# EAGLE board bt-shield (EAGLE 6.1)
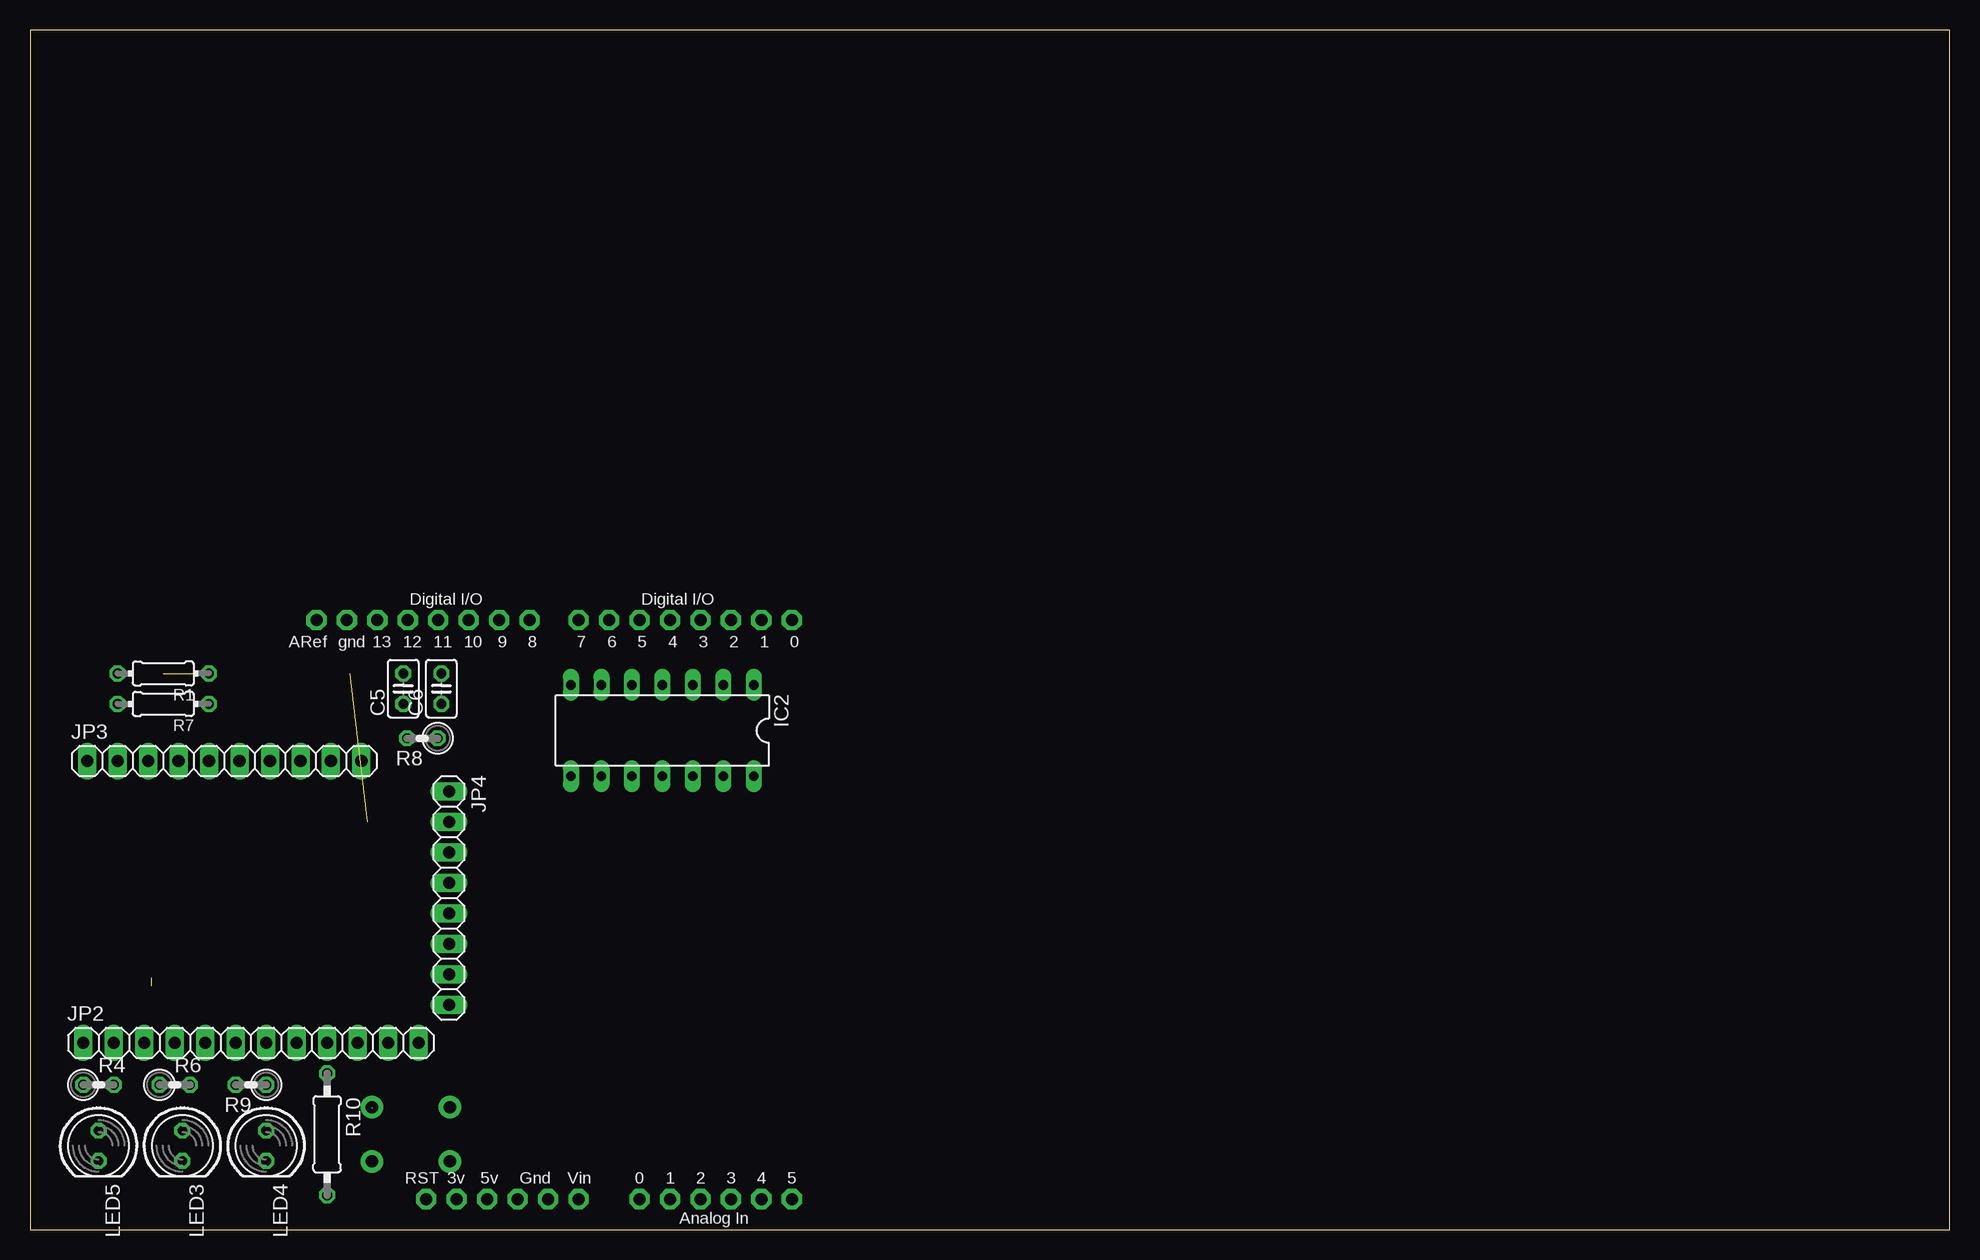
[diagram p0: board, top side]
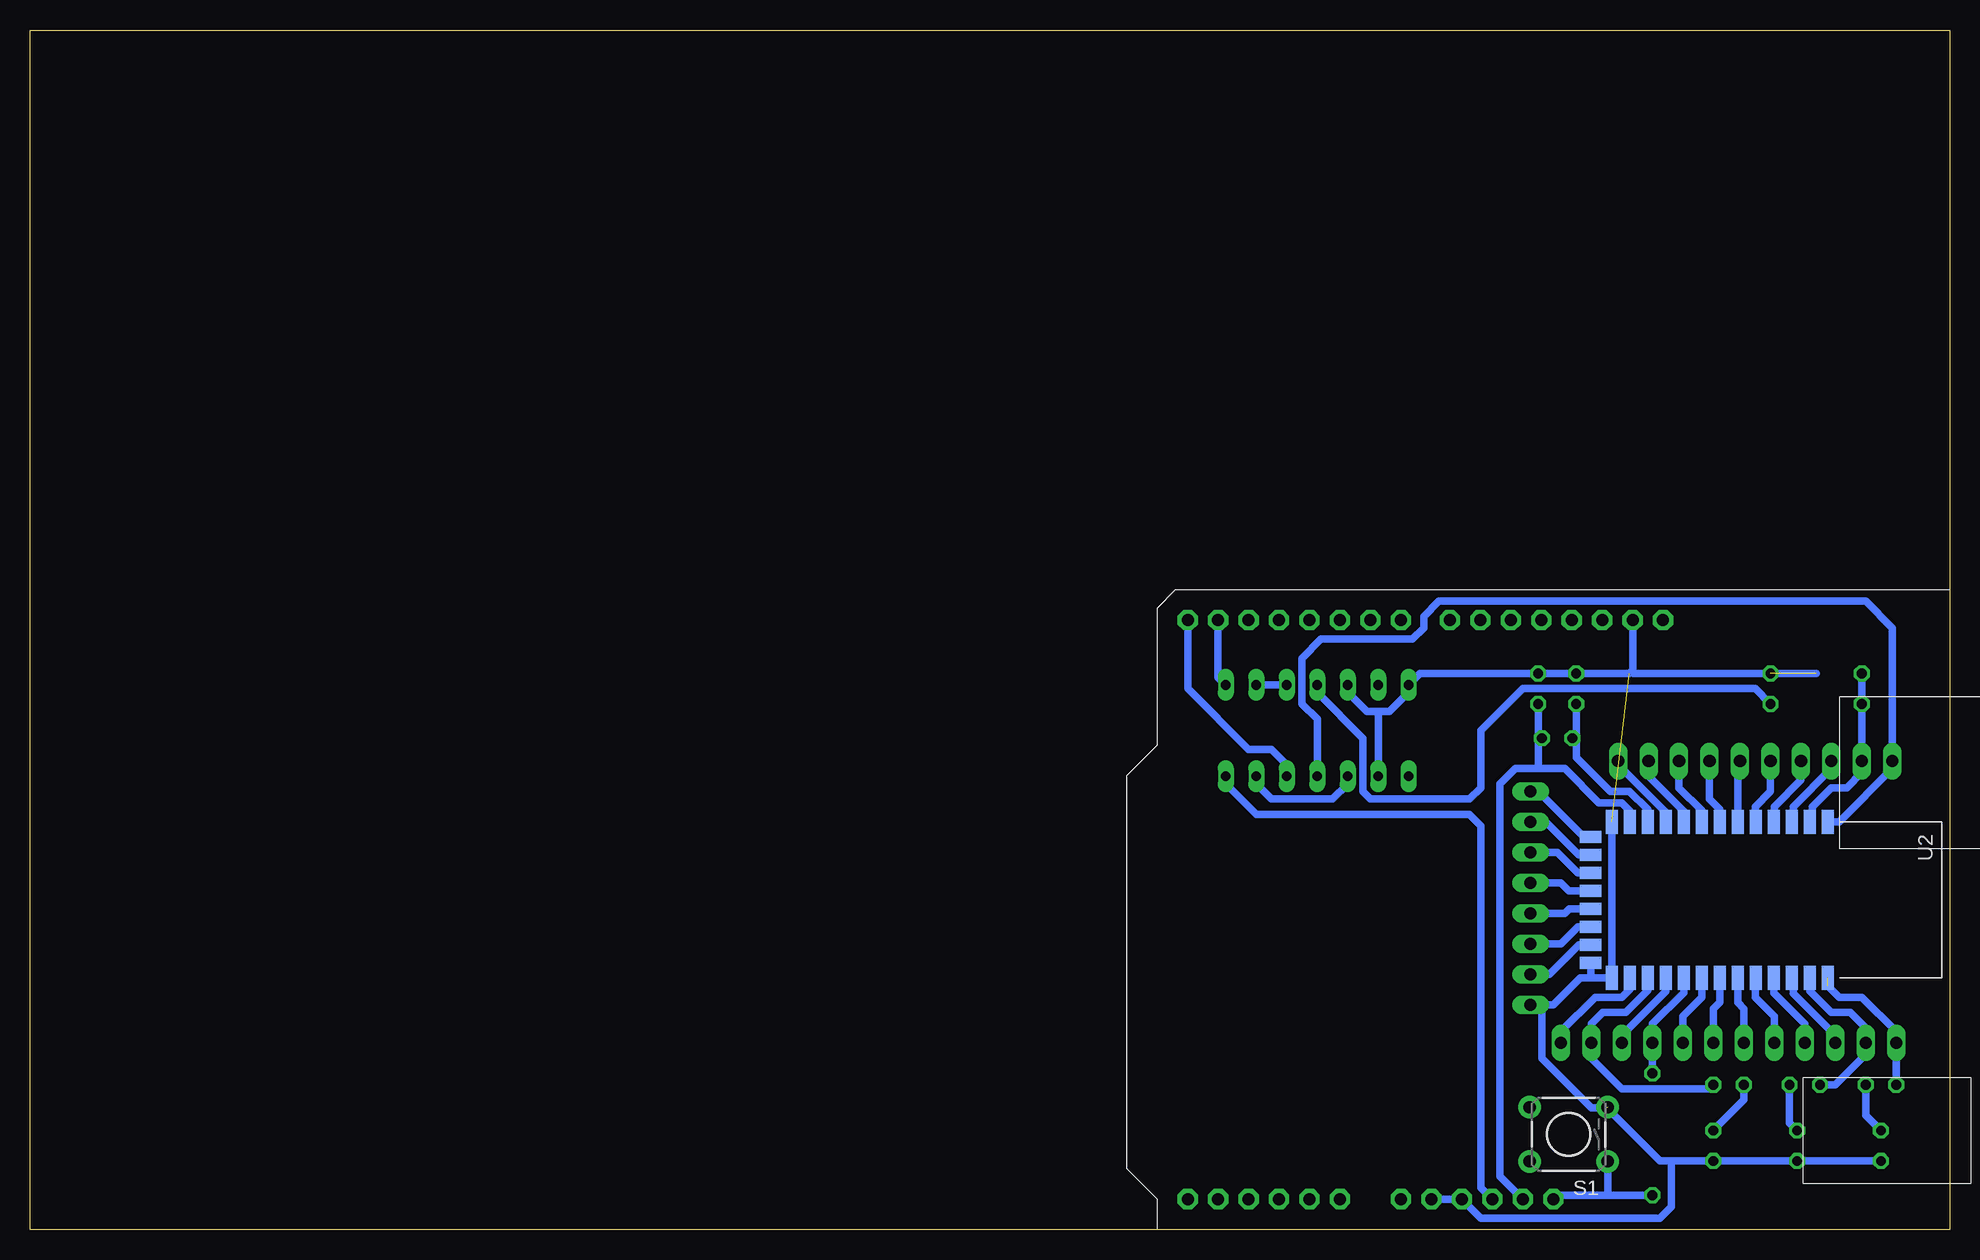
[diagram p1: board, bottom side, seen from below]

Size 160 x 100 mm. Coordinates in mm from the lower left corner, seen from the top.
Outline: 0,0 160,0 160,100 0,100 0,0
Copper layers (1*16): Top 0.035mm / dielectric 1.5mm / Bottom 0.035mm
Design rules: minimum track width 10mil, minimum drill 24mil, track to track 8mil, track to pad 8mil, pad to pad 8mil, via to via 8mil, smd to smd 8mil, copper to edge 40mil, drill to drill 8mil, minimum pad ring 10mil, minimum via ring 8mil, stop-mask expansion 4mil, vias tented up to drill 0mil, thermal gap 10mil

## Footprints (pad centres in the part's own frame; a part is rotated, then mirrored left to right if it is on the bottom)
C025-025X050 = drill 0.813 octagon: 1 -1.27,0; 2 1.27,0
DIL14 = drill 0.813 long: 1 -7.62,-3.81; 2 -5.08,-3.81; 3 -2.54,-3.81; 4 0,-3.81; 5 2.54,-3.81; 6 5.08,-3.81; 7 7.62,-3.81; 8 7.62,3.81; 9 5.08,3.81; 10 2.54,3.81; 11 0,3.81; 12 -2.54,3.81; 13 -5.08,3.81; 14 -7.62,3.81
1X12 = drill 1.016 long: 1 -13.97,0; 2 -11.43,0; 3 -8.89,0; 4 -6.35,0; 5 -3.81,0; 6 -1.27,0; 7 1.27,0; 8 3.81,0; 9 6.35,0; 10 8.89,0; 11 11.43,0; 12 13.97,0
1X10 = drill 1.016 long: 1 -11.43,0; 2 -8.89,0; 3 -6.35,0; 4 -3.81,0; 5 -1.27,0; 6 1.27,0; 7 3.81,0; 8 6.35,0; 9 8.89,0; 10 11.43,0
1X08 = drill 1.016 long: 1 -8.89,0; 2 -6.35,0; 3 -3.81,0; 4 -1.27,0; 5 1.27,0; 6 3.81,0; 7 6.35,0; 8 8.89,0
LED5MM = drill 0.813 octagon: A -1.27,0; K 1.27,0
0204/7 = drill 0.813 octagon: 1 -3.81,0; 2 3.81,0
0207/2V = drill 0.813 octagon: 1 -1.27,0; 2 1.27,0
0207/10 = drill 0.813 octagon: 1 -5.08,0; 2 5.08,0
TACTILE-PTH = drill 1.016 pad 1.88: 1 -3.251,2.261; 2 3.251,2.261; 3 -3.251,-2.261; 4 3.251,-2.261
BLUETOOTH_SMD = smd 2 x 1: 1 0,0; 2 0,-1.5; 3 0,-3; 4 0,-4.5; 5 0,-6; 6 0,-7.5; 7 0,-9; 8 0,-10.5; 9 0,-12; 10 0,-13.5; 11 0,-15; 12 0,-16.5; 13 0,-18; 22 13,-18; 23 13,-16.5; 24 13,-15; 25 13,-13.5; 26 13,-12; 27 13,-10.5; 28 13,-9; 29 13,-7.5; 30 13,-6; 31 13,-4.5; 32 13,-3; 33 13,-1.5; 34 13,0 | smd 1 x 1.8: 14 1.25,-19.75; 15 2.75,-19.75; 16 4.25,-19.75; 17 5.75,-19.75; 18 7.25,-19.75; 19 8.75,-19.75; 20 10.25,-19.75; 21 11.75,-19.75
ARDUINO-NOHOLE = drill 1 pad 1.676 octagon: 3V 35.56,2.54; 5V 38.1,2.54; A0 50.8,2.54; A1 53.34,2.54; A2 55.88,2.54; A3 58.42,2.54; A4 60.96,2.54; A5 63.5,2.54; AREF 23.876,50.8; D0 63.5,50.8; D1 60.96,50.8; D2 58.42,50.8; D3 55.88,50.8; D4 53.34,50.8; D5 50.8,50.8; D6 48.26,50.8; D7 45.72,50.8; D8 41.656,50.8; D9 39.116,50.8; D10 36.576,50.8; D11 34.036,50.8; D12 31.496,50.8; D13 28.956,50.8; GND 26.416,50.8; GND1 43.18,2.54; GND2 40.64,2.54; RESET 33.02,2.54; VIN 45.72,2.54

## Placement (x,y rotation side)
C5  u1  [C025-025X050]  31.11,45.09 90 top
C6  u1  [C025-025X050]  34.29,45.09 90 top
IC2  74AC14N  [DIL14]  52.7,41.59 180 top
JP2  [1X12]  18.41,15.56 0 top
JP3  [1X10]  16.19,39.05 0 top
JP4  [1X08]  34.92,27.62 270 top
LED3  ROT  [LED5MM]  12.7,6.99 270 top
LED4  GELB  [LED5MM]  19.68,6.99 270 top
LED5  GRÜN  [LED5MM]  5.71,6.99 270 top
R1  6K8  [0204/7]  11.11,46.35 180 top
R4  330  [0207/2V]  5.71,12.06 0 top
R6  330  [0207/2V]  12.06,12.06 0 top
R7  3K3  [0204/7]  11.11,43.81 180 top
R8  1M  [0207/2V]  32.7,40.96 180 top
R9  330  [0207/2V]  18.41,12.06 180 top
R10  10K  [0207/10]  24.77,7.94 270 top
S1  SW  [TACTILE-PTH]  31.75,7.94 180 bottom
U2  HC_05  [BLUETOOTH_SMD]  10.16,33.97 270 bottom
U$1  ARDUINO-NOHOLE  [ARDUINO-NOHOLE]  0,0 0 top

## Library data of the parts
C5 C6 R1 R4 R6-R10 = rcl
IC2 = 74xx-eu
JP2-JP4 = pinhead
LED3-LED5 = led
S1 = SparkFun
U2 = SerialPortBluetooth
U$1 = adafruit

## Nets
+3V3: C6.1 R8.1 U2.12 U$1.3V
+5V: IC2.14 U$1.5V
GND: C5.2 C6.2 IC2.5 IC2.7 IC2.9 JP4.8 LED3.K LED4.K LED5.K R1.1 S1.3 U2.13 U2.21 U2.22 U$1.GND U$1.GND1 U$1.GND2
N$1: IC2.12 U$1.D0
N$2: R10.2 S1.1 U$1.RESET
N$3: JP3.3 U2.3
N$4: C5.1 R8.2 U2.11
N$5: JP2.2 R6.1 U2.33
N$7: JP2.1 R4.1 U2.34
N$8: LED3.A R6.2
N$9: LED5.A R4.2
N$10: LED4.A R9.2
N$11: JP2.11 R9.1 U2.24
N$12: JP2.9 R10.1 U2.26
N$13: JP3.4 U2.4
N$14: IC2.10 IC2.13
N$15: JP3.5 U2.5
N$16: IC2.11 JP3.1 U2.1
N$17: IC2.4 R7.1
N$18: IC2.2 IC2.3
N$19: IC2.1 U$1.D1
N$20: JP3.2 R1.2 R7.2 U2.2
N$21: JP3.6 U2.6
N$22: JP3.7 U2.7
N$23: JP3.8 U2.8
N$24: JP3.9 U2.9
N$25: JP3.10 U2.10
N$26: JP2.3 U2.32
N$27: JP2.4 U2.31
N$28: JP2.5 U2.30
N$29: JP2.6 U2.29
N$30: JP2.7 U2.28
N$31: JP2.8 U2.27
N$32: JP2.10 U2.25
N$33: JP2.12 U2.23
N$34: JP4.7 U2.20
N$35: JP4.6 U2.19
N$36: JP4.5 U2.18
N$38: JP4.3 U2.16
N$39: JP4.2 U2.15
N$40: JP4.1 U2.14
N$41: JP4.4 U2.17
VIN: U$1.VIN

## Tracks (layer width: path | path; a pad name or v marks a point on that pad's centre or on a via)
+3V3
  Bottom 0.61: 34.29,38.42 36.2,38.42 37.47,37.15 37.47,4.45 U$1.3V | 34.29,38.42 32.07,38.42 29.21,35.56 27.3,35.56 26.66,34.91 U2.12 | C6.1 34.29,40.96 | 34.29,40.96 34.29,38.42 | 33.66,40.96 R8.1 34.29,40.96
+5V
  Bottom 0.61: IC2.14 60.33,37.15 57.78,34.61 40.01,34.61 39.05,33.66 39.05,3.49 U$1.5V
GND  (3 unrouted)
  Bottom 0.61: JP4.8 33.97,18.73 | 33.97,18.73 33.02,18.73 30.78,20.97 29.84,20.97 | U$1.GND1 U$1.GND2 39.05,0.95 24.13,0.95 23.18,1.91 23.18,5.71 | 47.62,43.18 46.67,43.18 45.09,44.77 IC2.7 44.13,46.35 C6.2 C5.2 26.67,46.35 26.51,46.51 | 47.62,43.18 IC2.9 | 47.62,43.18 48.58,43.18 50.16,44.77 IC2.5 | 33.97,18.73 33.97,14.29 29.84,10.16 28.57,10.16 24.13,5.71 23.18,5.71 | U2.13 28.16,21.05 28.24,20.97 | U2.21 29.91,21.04 29.84,20.97 | 29.84,20.97 U2.22 | U2.22 27.96,20.97 27.94,20.95 28.26,20.95 28.24,20.97 | U2.22 28.24,20.97 | U$1.GND 26.42,46.61 26.51,46.51 | LED5.K LED3.K LED4.K 23.18,5.71 | 26.51,46.51 26.35,46.35 11.11,46.35
N$1
  Bottom 0.61: IC2.12 55.24,38.73 56.52,40.01 58.42,40.01 63.5,45.09 U$1.D0
N$2
  Bottom 0.61: R10.2 28.57,2.86 | 28.57,2.86 32.7,2.86 U$1.RESET | S1.1 28.5,2.93 28.57,2.86
N$3
  Bottom 0.61: JP3.3 9.84,38.42 13.02,35.24 13.02,34.12 U2.3
N$4
  Bottom 0.61: U2.11 25.16,35 26.67,36.51 28.26,36.51 31.11,39.37 31.11,40.64 | 31.11,40.64 C5.1 | R8.2 31.11,40.64
N$5
  Bottom 0.61: U2.33 11.66,19.91 9.84,18.1 8.26,18.1 6.99,16.83 JP2.2 6.99,14.61 9.53,12.06 R6.1
N$7  (1 unrouted)
  Bottom 0.61: R4.1 JP2.1 4.45,16.51 7.3,19.37 9.21,19.37 10.16,20.32
N$8
  Bottom 0.61: LED3.A 13.34,8.89 R6.2
N$9
  Bottom 0.61: LED5.A 6.99,9.53 R4.2
N$10
  Bottom 0.61: R9.2 17.14,10.79 LED4.A
N$11
  Bottom 0.61: U2.24 25.16,19.93 26.99,18.1 28.89,18.1 29.84,17.14 JP2.11 29.84,14.29 27.3,11.75 20,11.75 R9.1
N$12
  Bottom 0.61: U2.26 22.16,19.75 24.77,17.14 JP2.9 R10.1
N$13
  Bottom 0.61: JP3.4 12.38,37.47 14.61,35.24 14.61,34.03 U2.4
N$14
  Bottom 0.61: IC2.10 50.16,37.15 51.44,35.88 56.52,35.88 57.78,37.15 IC2.13
N$15
  Bottom 0.61: JP3.5 14.92,36.51 16.19,35.24 16.19,34.01 U2.5
N$16
  Bottom 0.61: IC2.11 52.7,42.55 53.98,43.81 53.98,47.62 52.39,49.21 44.77,49.21 43.81,50.16 43.81,51.12 42.55,52.39 6.99,52.39 4.76,50.16 JP3.1 4.76,38.42 9.21,33.97 U2.1
N$17
  Bottom 0.61: IC2.4 52.7,44.77 48.9,40.96 48.9,36.51 48.26,35.88 40.01,35.88 39.05,36.83 39.05,41.59 35.56,45.09 16.19,45.09 R7.1
N$18
  Bottom 0.61: IC2.3 IC2.2
N$19
  Bottom 0.61: IC2.1 60.96,46.04 U$1.D1
N$20
  Bottom 0.61: U2.2 11.66,34.7 11.43,34.92 11.43,35.24 9.84,36.83 8.57,36.83 7.3,38.1 JP3.2 R7.2 R1.2
N$21
  Bottom 0.61: U2.6 17.66,38.22 17.46,38.42 JP3.6
N$22
  Bottom 0.61: U2.7 19.16,35.03 20,35.88 JP3.7
N$23
  Bottom 0.61: U2.8 20.66,34.95 22.54,36.83 JP3.8
N$24
  Bottom 0.61: U2.9 22.16,34.86 25.08,37.78 JP3.9
N$25
  Bottom 0.61: U2.10 23.66,34.77 27.62,38.73 JP3.10
N$26
  Bottom 0.61: U2.32 13.02,20.83 13.02,19.68 9.53,16.19 JP2.3
N$27
  Bottom 0.61: U2.31 14.66,19.74 12.06,17.14 JP2.4
N$28
  Bottom 0.61: U2.30 16.19,20.94 16.19,19.37 14.61,17.78 JP2.5
N$29
  Bottom 0.61: U2.29 17.66,18.93 17.14,18.41 JP2.6
N$30
  Bottom 0.61: U2.28 19.16,18.94 19.68,18.41 JP2.7
N$31
  Bottom 0.61: U2.27 20.66,19.34 22.23,17.78 JP2.8
N$32
  Bottom 0.61: U2.25 23.66,19.84 27.3,16.19 JP2.10
N$33
  Bottom 0.61: U2.23 26.66,20.01 27.3,19.37 29.53,19.37 32.38,16.51 JP2.12
N$34
  Bottom 0.61: U2.20 30.89,23.72 33.34,21.27 JP4.7
N$35
  Bottom 0.61: U2.19 30.98,25.22 32.38,23.81 JP4.6
N$36
  Bottom 0.61: U2.18 31.7,26.72 32.07,26.35 JP4.5
N$38
  Bottom 0.61: U2.16 30.99,29.72 32.7,31.43 JP4.3
N$39
  Bottom 0.61: U2.15 30.91,31.22 33.66,33.97 JP4.2
N$40
  Bottom 0.61: U2.14 30.5,32.72 34.29,36.51 JP4.1
N$41
  Bottom 0.61: U2.17 31.71,28.22 32.38,28.89 JP4.4